# Altium PCB ledring.PcbDoc
Units mm, origin at the board's own origin, x right, y up, seen from the top; angles counter-clockwise.
Board outline 120 x 120 mm, 2 copper layers (Top Layer, Bottom Layer); 21 components, 7 nets, 42 pads, 14 vias.
Unrouted connection lines stored in the file: 6.
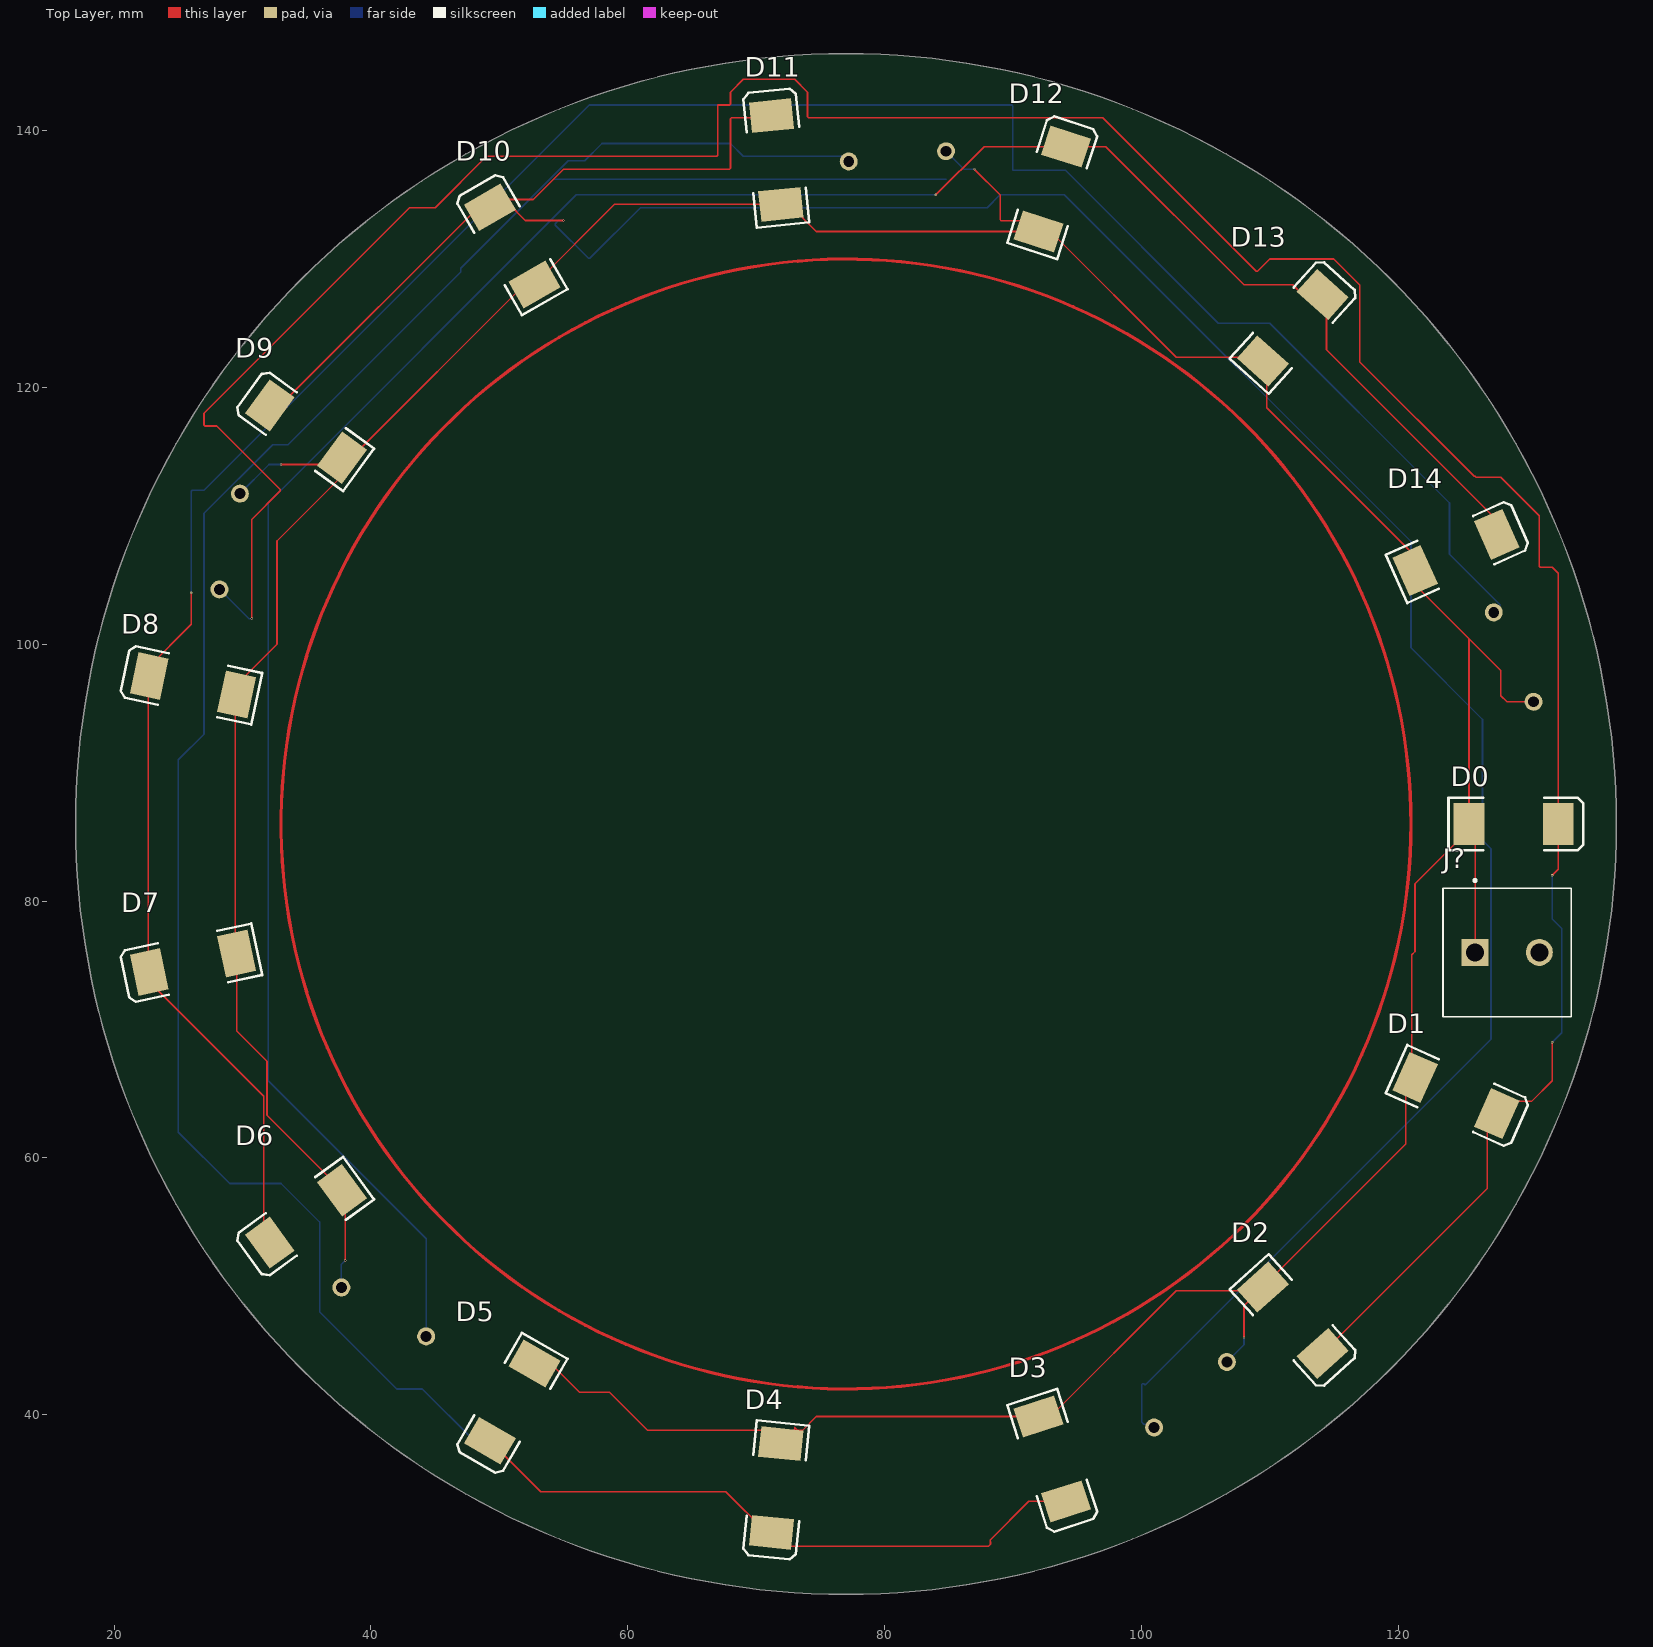
[diagram p0: Top Layer view]
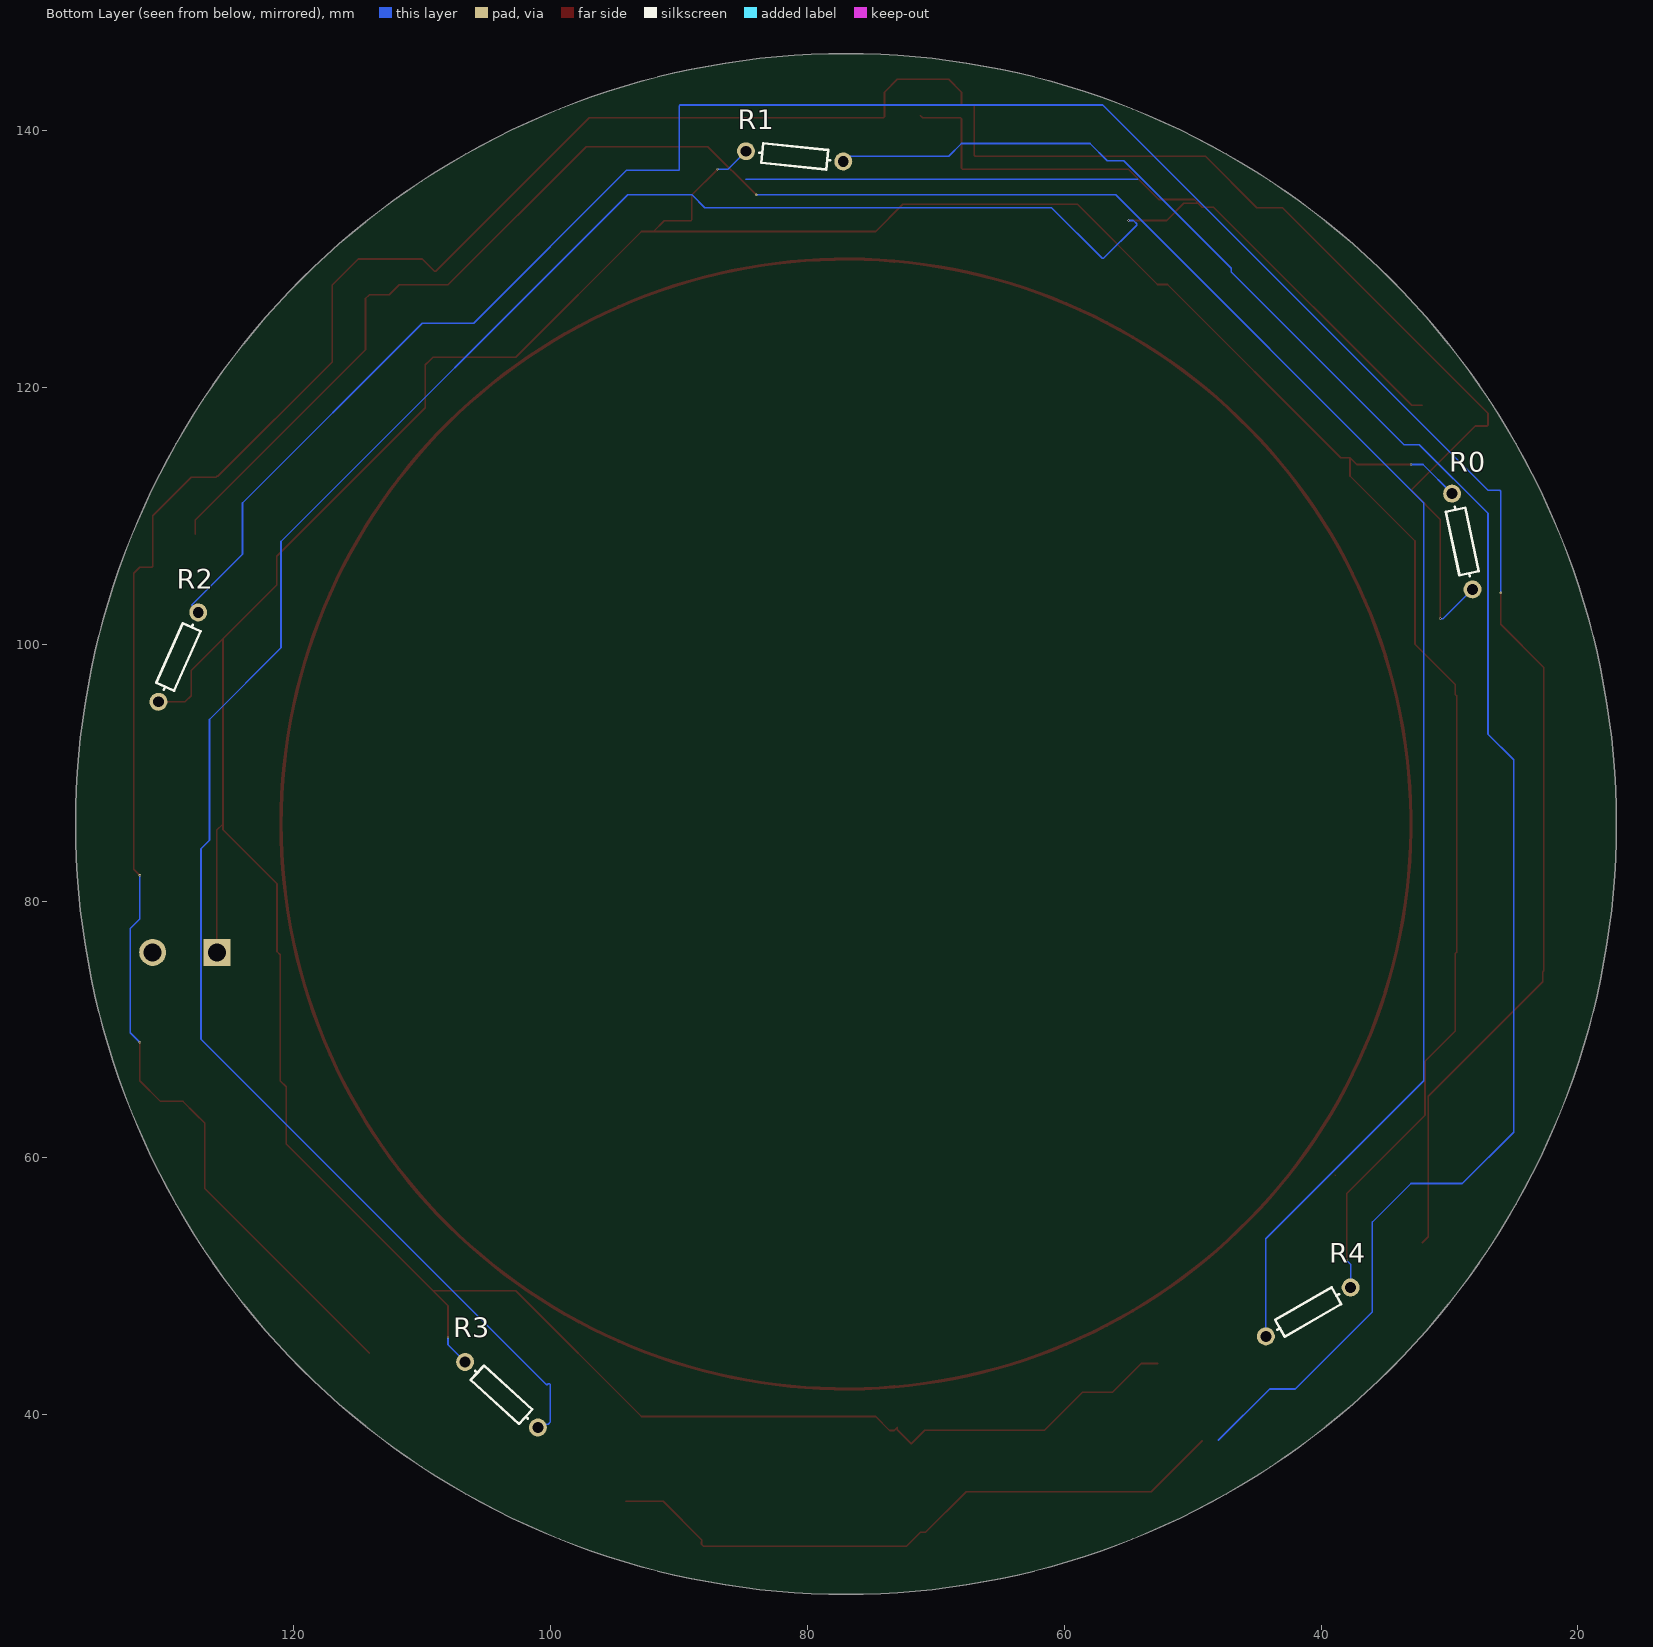
[diagram p1: Bottom Layer view, seen from below]

## Layer stack, top to bottom
Top Solder: solder mask 0.0102, Solder Resist, Dk 3.5
Top Layer: signal copper 0.0356
Dielectric 1: dielectric 0.32, FR-4, Dk 4.8
Bottom Layer: signal copper 0.0356
Bottom Solder: solder mask 0.0102, Solder Resist, Dk 3.5

## Board outline
77,26 cw(c77,86) 17,86 cw(c77,86) 77,146 cw(c77,86) 137,86 cw(c77,86)

## Design rules (kind name [scope] priority, off if disabled: settings)
Clearance [All] p1: gap=0.127 ignorepadtopadclearanceinfootprint=FALSE except(0: Arc-Hole Track-Hole SMDPad-Hole THPad-Hole Via-Hole Fill-Hole Poly-Hole Region-Hole Text-Hole)
ComponentClearance [All] p1: gap=0.203 collisioncheckmode=3 verticalgap=0.203 showdistances=FALSE
FanoutControl Fanout_BGA [IsBGA] p1: bgadir=Out bgaviamode=Centered fanoutstyle=BGA fanoutdirection=Alternating viagrid=0.025 // Fanout_BGA (Default Rule)
HoleSize [All] p1: absolutevalues=TRUE maxlimit=2.54 minlimit=0.254 maxpercent=80.000 minpercent=20.000
HoleToHoleClearance [All] p1: gap=0.152 allowstackedmicrovias=TRUE
MinimumAnnularRing [All] p1: minimumring=0.005
MinimumSolderMaskSliver MinimumSolderMaskSliver_M0BGA_Fanout [All] p1: minsoldermaskwidth=0.1
MinimumSolderMaskSliver [All] p2: minsoldermaskwidth=0.127
PlaneClearance [All] p1: clearance=0.254
PolygonConnect [All] p1: connectstyle=Relief reliefconductorwidth=0.254 reliefentries=4 polygonreliefangle="90 Angle" airgapwidth=0.254
RoutingVias [All] p1: holewidth=0.076 width=0.178 viastyle="Through Hole" minholewidth=0.076 minwidth=0.178 maxholewidth=0.254 maxwidth=0.356
SilkToSilkClearance [All] p1: silktosilkclearance=0.127
SilkToSolderMaskClearance [IsPad] p1: minsilkscreentomaskgap=0.127 clearancetoexposedcopper=TRUE
SolderMaskExpansion SolderMaskExpansion_M0BGA_Fanout [WithinRoom('M0BGA_Fanout')] p1: expansion=0.01 istentingtop=FALSE
SolderMaskExpansion [All] p2: expansion=0.102 istentingtop=FALSE
UnRoutedNet [All] p1: checkbadconnections=TRUE
Width [All] p1: maxlimit=12.7 minlimit=0.065 preferedwidth=0.127 minimp=50.000000 maximp=50.000000 favimp=50.000000
21 further rules are at their usual default settings.

## Components (designator, comment, footprint, x,y, rotation, side; value= is the part's Value field where it differs from the comment)
D0 "Diode" SMC 129,86 r0 top
D1 "Diode" SMC 124.504,64.85 r336 top
D2 "Diode" SMC 111.794,47.357 r312 top
D3 "Diode" SMC 93.068,36.546 r288 top
D4 "Diode" SMC 71.565,34.285 r264 top
D5 "Diode" SMC 51,40.967 r240 top
D6 "Diode" SMC 34.932,55.436 r216 top
D7 "Diode" SMC 26.137,75.189 r192 top
D8 "Diode" SMC 26.137,96.811 r168 top
D9 "Diode" SMC 34.932,116.564 r144 top
D10 "Diode" SMC 51,131.033 r120 top
D11 "Diode" SMC 71.565,137.715 r96 top
D12 "Diode" SMC 93.068,135.454 r72 top
D13 "Diode" SMC 111.794,124.643 r48 top
D14 "Diode" SMC 124.504,107.15 r24 top
J? "282856-2" *TE_282856-2 128.5,76 r0 top
R0 "Res1" AXIAL-0.3 29,108 r78 bottom value=1K
R1 "Res1" AXIAL-0.3 81,138 r6 bottom value=1K
R2 "Res1" AXIAL-0.3 129,99 r294 bottom value=1K
R3 "Res1" AXIAL-0.3 103.831,41.549 r42 bottom value=1K
R4 "Res1" AXIAL-0.3 41,48 r150 bottom value=1K

## Footprints (in the part's own frame and the unit in brackets; to place one, negate y for a bottom-side part, rotate by r counter-clockwise, add the part's x,y. Pads: shape width x height; smd on the part's side, far side on the other; paste and mask are expansions set on the pad)
*TE_282856-2 [mm]
  rect 2.1x2.1 hole 1.4: 1(-2.5,0)
  round 2.1 hole 1.4: 2(2.5,0)
  silkscreen extent -5,-5 5,5.7
AXIAL-0.3 [mm] "Axial Device, Thru-Hole; 2 Leads; 0.3 in Pin Spacing"
  round 1.4 hole 0.85: 1(-3.81,0) 2(3.81,0)
  silkscreen extent -2.77,-0.76 2.77,0.76
SMC [mm] "DO-214-AB/SMC; 2 C-Bend Leads; Body 7.9 x 5.9 mm, inc. leads (LxW)"
  rect 2.4x3.3 smd: 1(-3.475,0) 2(3.475,0)
  silkscreen extent -5.07,-2.05 5.43,2.05

## Part data
D0 D1 D2 D3 D4 D5 D6 D7 D8 D9 D10 D11 D12 D13 D14: "Default Diode", Code_JEDEC=DO-214-AB, LatestRevisionDate=17-Jul-2002, LatestRevisionNote="Re-released for DXP Platform.", PackageDescription="DO-214-AB/SMC; 2 C-Bend Leads; Body 7.9 x 5.9 mm, inc. leads (LxW)", PackageReference=SMC, PackageVersion=Sep-1996, Published=8-Jun-2000, Publisher="Altium Limited"
J?: "TERMI-BLOK PCB MOUNT 2P", Package=None, Availability=Unavailable, EU_RoHS_Compliance="Compliant with Exemptions", MF="TE Connectivity", MP=282856-2, Price=None, SnapEDA_Link=https://www.snapeda.com/parts/282856-2/TE%20Connectivity%20AMP%20Connectors/view-part/1809079/?ref=snap, TE_purchase_URL=https://www.te.com/usa-en/product-282856-2.html?te_bu=Cor&te_type=disp&te_campaign=seda_glo_cor-seda-global-disp-prtnr-fy19-seda-model-bom-cta_sma-317_1&elqCampaignId=32493
R0 R1 R2 R3 R4: "Resistor", LatestRevisionDate=17-Jul-2002, LatestRevisionNote="Re-released for DXP Platform.", PackageDescription="Axial Device, Thru-Hole; 2 Leads; 0.3 in Pin Spacing", PackageReference=AXIAL-0.3, Published=8-Jun-2000, Publisher="Altium Limited"

## Via types
v1: diameter 0.178, hole 0.076, Top Layer to Bottom Layer, 10 vias
v2: diameter 1.27, hole 0.711, Top Layer to Bottom Layer, 4 vias

## Nets (pads, with @x,y where several pads share a name; then routed paths per layer and width w, separated by ;. In a path a pad name is that pad's centre, name@x,y a point inside that pad or via, vN(x,y) a via of type N, cw(c..) or ccw(c..) an arc to the next point about the centre after c; other vN are vias at no path point)
NetD0_1: D0.1 D1.1 D2.1 D3.1 D4.1 D5.1 D6.1 D7.1 D8.1 D9.1 D10.1 D11.1 D12.1 D13.1 D14.1 J?.1 | length 352.6
  Top Layer w0.127: v1(33,114) 37.222,114 D9.1 ; v1(38,52) 38,57.222 D6.1 31.908,63.314 31.908,67.527 29.536,69.899 D7.1 29.443,76.005 29.443,95.995 D8.1 29.536,96.844 32.683,99.991 32.683,108.04 37.743,113.101 D9.1 ; D5.1 54.012,43.976 56.243,41.746 58.58,41.746 61.533,38.792 70.877,38.792 D4.1 73,38.813 73,39 73.238,38.762 73.605,38.762 74.694,39.851 D3.1 92.935,39.851 102.722,49.638 D2.1@109.168,49.638 ; v1(87,137) 89,135 89,133.074 89.079,132.995 91.148,132.995 D12.1 ; v1(108,46) 108,48.471 D2.1 ; J?.1 126,85.525 D0.1 ; 130.55,95.519 128.481,95.519 128,96 128,97.952 125.525,100.427 ; D9.1 38.463,114.521 51.965,128.024 D10.1 58.973,134.259 D11.1 72.584,134.259 74.694,132.149 D12.1 ; D12.1 92.935,132.149 102.722,122.362 109.168,122.362 D13.1 109.77,121.759 109.77,118.411 121.329,106.851 D14.1 121.329,104.622 125.525,100.427 ; D2.1@109.168,49.638 D2.1 ; D2.1@109.168,49.638 D2.1 ; D2.1 120.602,61.072 120.602,65.536 121.057,65.991 121.057,75.814 121.318,76.074 121.318,81.342 125.525,85.55 D0.1 ; D0.1 125.525,100.427
  Bottom Layer w0.127: 29.792,111.727 32.065,114 v1(33,114) ; v2(37.7,49.905) 37.7,51.7 v1(38,52) ; 84.789,138.398 86.187,137 v1(87,137) ; 106.663,44.099 108,45.436 v1(108,46)
NetD0_2: D0.2 D1.2 D2.2 R0.1 | length 236.1
  Top Layer w0.127: v1(30.721,102) 30.721,109.721 32.947,111.947 32.947,112.053 28,117 27.074,117 27,117.074 27,118 43,134 45,134 49,138 66.926,138 67,138.074 67,142 67.926,142 68,142.074 68,143 69,144 73,144 74,143 74,141.074 74.074,141 97,141 98,140 108.947,129.053 109.053,129.053 110,130 115,130 117,128 117,122 125.926,113.074 126,113.074 126.074,113 128,113 131,110 131,106.074 131.074,106 132,106 132.475,105.525 D0.2 132.475,82.475 v1(132,82) ; D2.2 126.951,57.606 126.951,62.709 D1.2 128.634,64.392 130.392,64.392 132,66 v1(132,69)
  Bottom Layer w0.127: v2(28.208,104.273) 30.481,102 v1(30.721,102) ; v1(132,69) 132.741,69.741 132.741,77.866 132,78.606 v1(132,82)
NetD3_2: D3.2 D4.2 D5.2 R1.1 | length 198.9
  Top Layer w0.127: D5.2 53.22,34 67.63,34 70.801,30.829 D4.2 72.285,29.746 88.105,29.746 88.254,29.895 88.254,30.105 88.232,30.127 88.232,30.232 91.241,33.241 D3.2
  Bottom Layer w0.127: 48,38 44,42 42,42 36,48 36,55 33,58 29,58 25,62 25,91 27,93 27,110.194 32.354,115.548 33.548,115.548 47,129 47,129.294 55.364,137.658 56.658,137.658 58,139 68,139 69,138 76.813,138 v2(77.211,137.602)
NetD6_2: D6.2 D7.2 D8.2 R2.1 | length 200.4
  Top Layer w0.127: v1(26,104) 26,101.551 22.644,98.196 22.644,74.56 D7.2 22.738,73.711 31.654,64.794 31.654,53.86 D6.2
  Bottom Layer w0.127: v1(26,104) 26,111.926 26.074,112 27,112 57,142 89.926,142 90,141.926 90,136.931 94.069,136.931 106,125 110,125 124,111 124,107 127.947,103.053 127.45,102.556 R2.1
NetD9_2: D9.2 D10.2 D11.2 R3.1 | length 222.3
  Top Layer w0.127: D9.2 32.947,118.607 48.383,134.042 D10.2 D10.2@49.563,134.343 ; v1(55,133) 52.03,133 50.687,134.343 D10.2@49.563,134.343 ; D11.2 71.031,141 68.074,141 68,140.926 68,137.074 67.926,137 55,137 52.643,134.643 49.863,134.643 D10.2@49.563,134.343
  Bottom Layer w0.127: v1(55,133) 54.613,133 54.359,132.746 54.359,132.641 56.947,130.053 57.053,130.053 61,134 88,134 89,135 94,135 121,108 121,99.718 126.574,94.144 126.574,84.735 127.241,84.069 127.241,69.241 100.348,42.348 100.243,42.348 100.18,42.412 100.09,42.412 100.027,42.348 100.027,39.418 100.201,39.244 100.756,39.244 R3.1
NetD12_2: D12.2 D13.2 D14.2 R4.1 | length 192.7
  Top Layer w0.127: v1(84,135) 87.759,138.759 D12.2 97.241,138.759 108,128 111.795,128 112.57,127.225 D13.2 114.42,126.924 114.42,122.936 127.679,109.678 D14.2
  Bottom Layer w0.127: v2(44.3,46.095) 44.3,53.7 32,66 32,111 56,135 v1(84,135)
NetJ?_2: J?.2 R0.2 R1.2 R2.2 R3.2 R4.2
copper on no net: | length 307
  Top Layer w0.254: 121,86 ccw(c77,86) 121,86
  Bottom Layer w0.127: 54.276,136.211 84.789,136.211